# EAGLE board CapstoneControllerBoardtest (EAGLE 9.2.2)
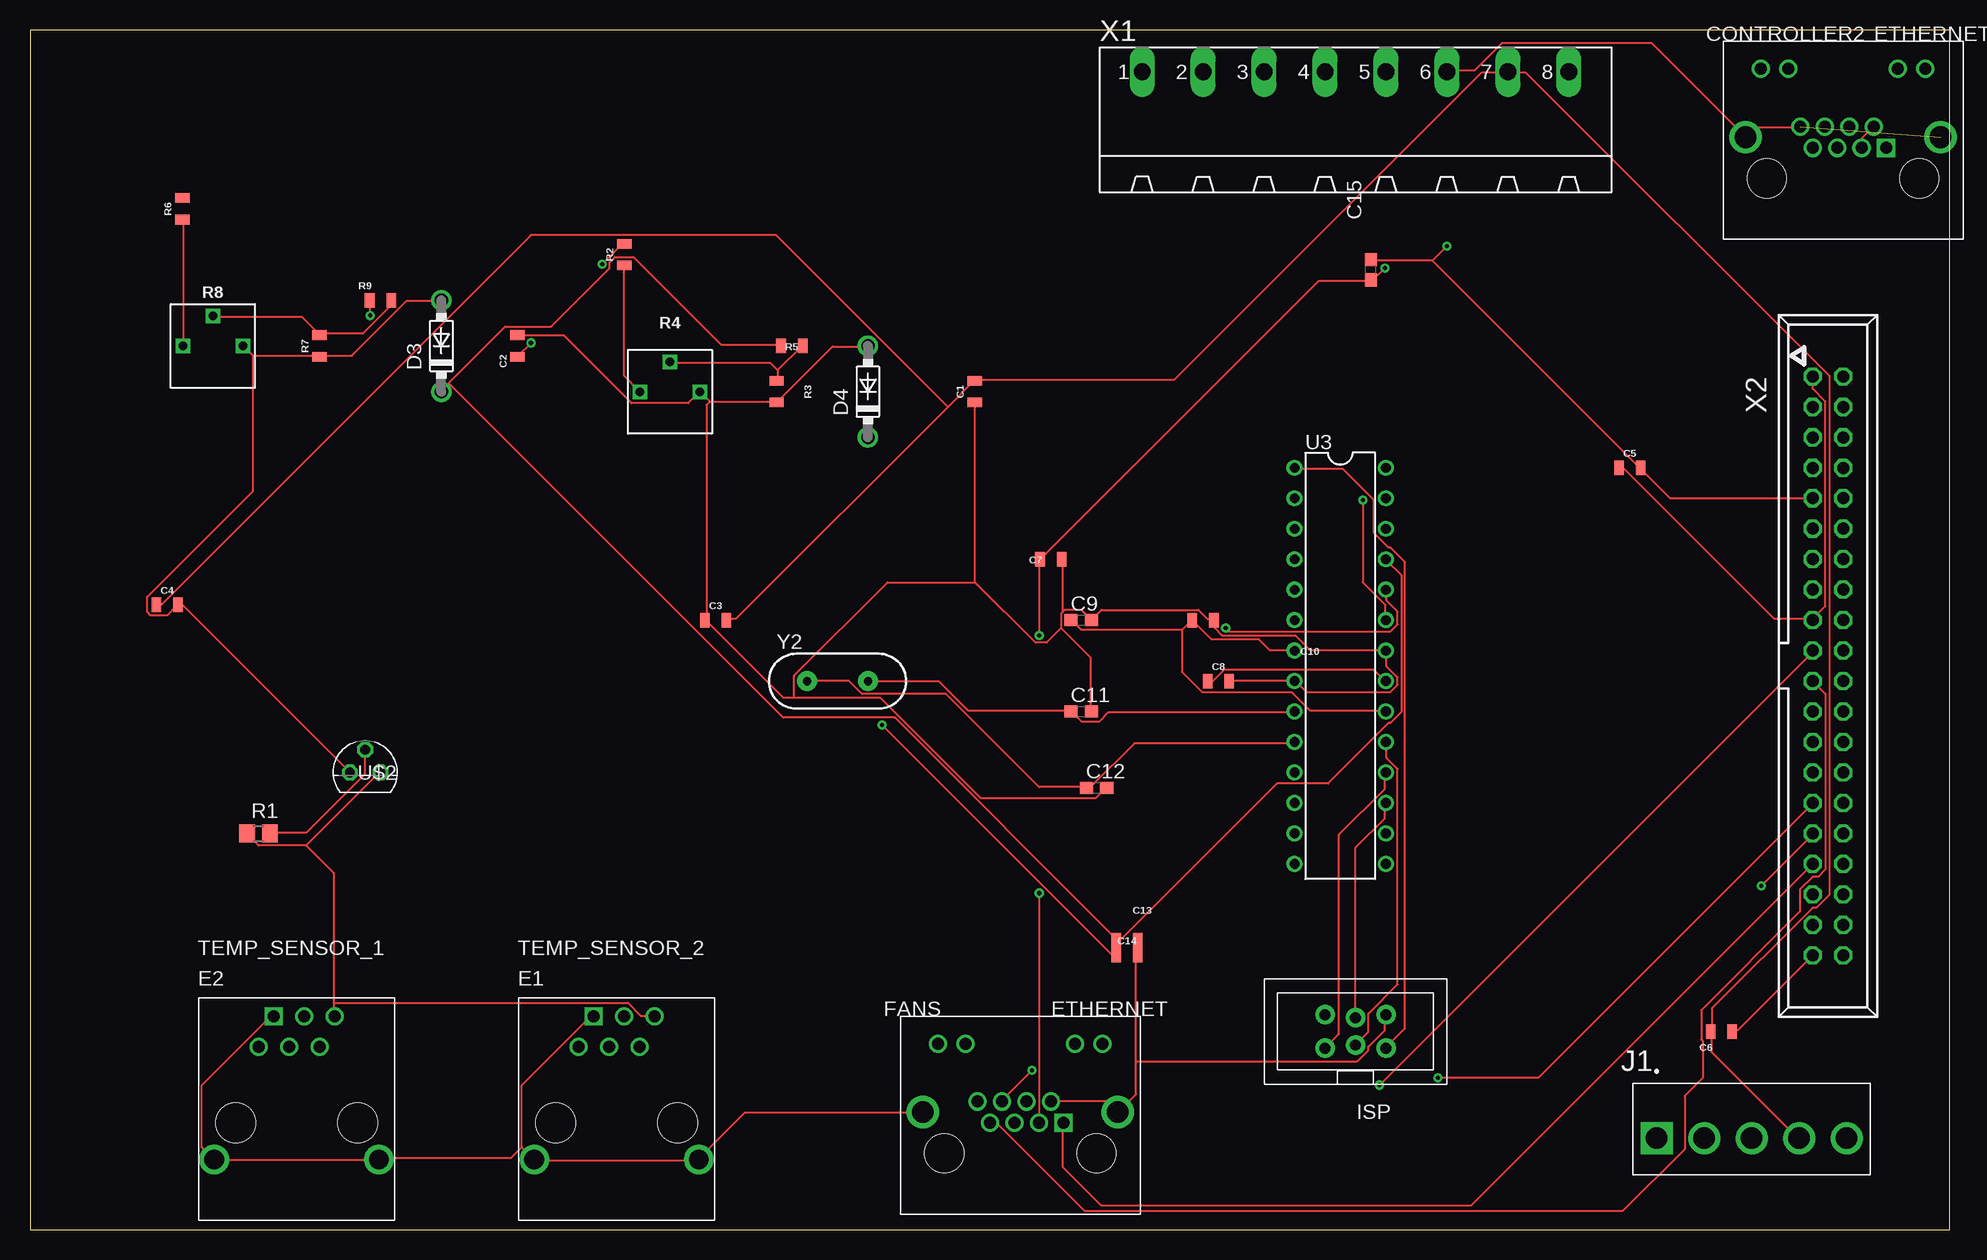
[diagram p0: board, top side]
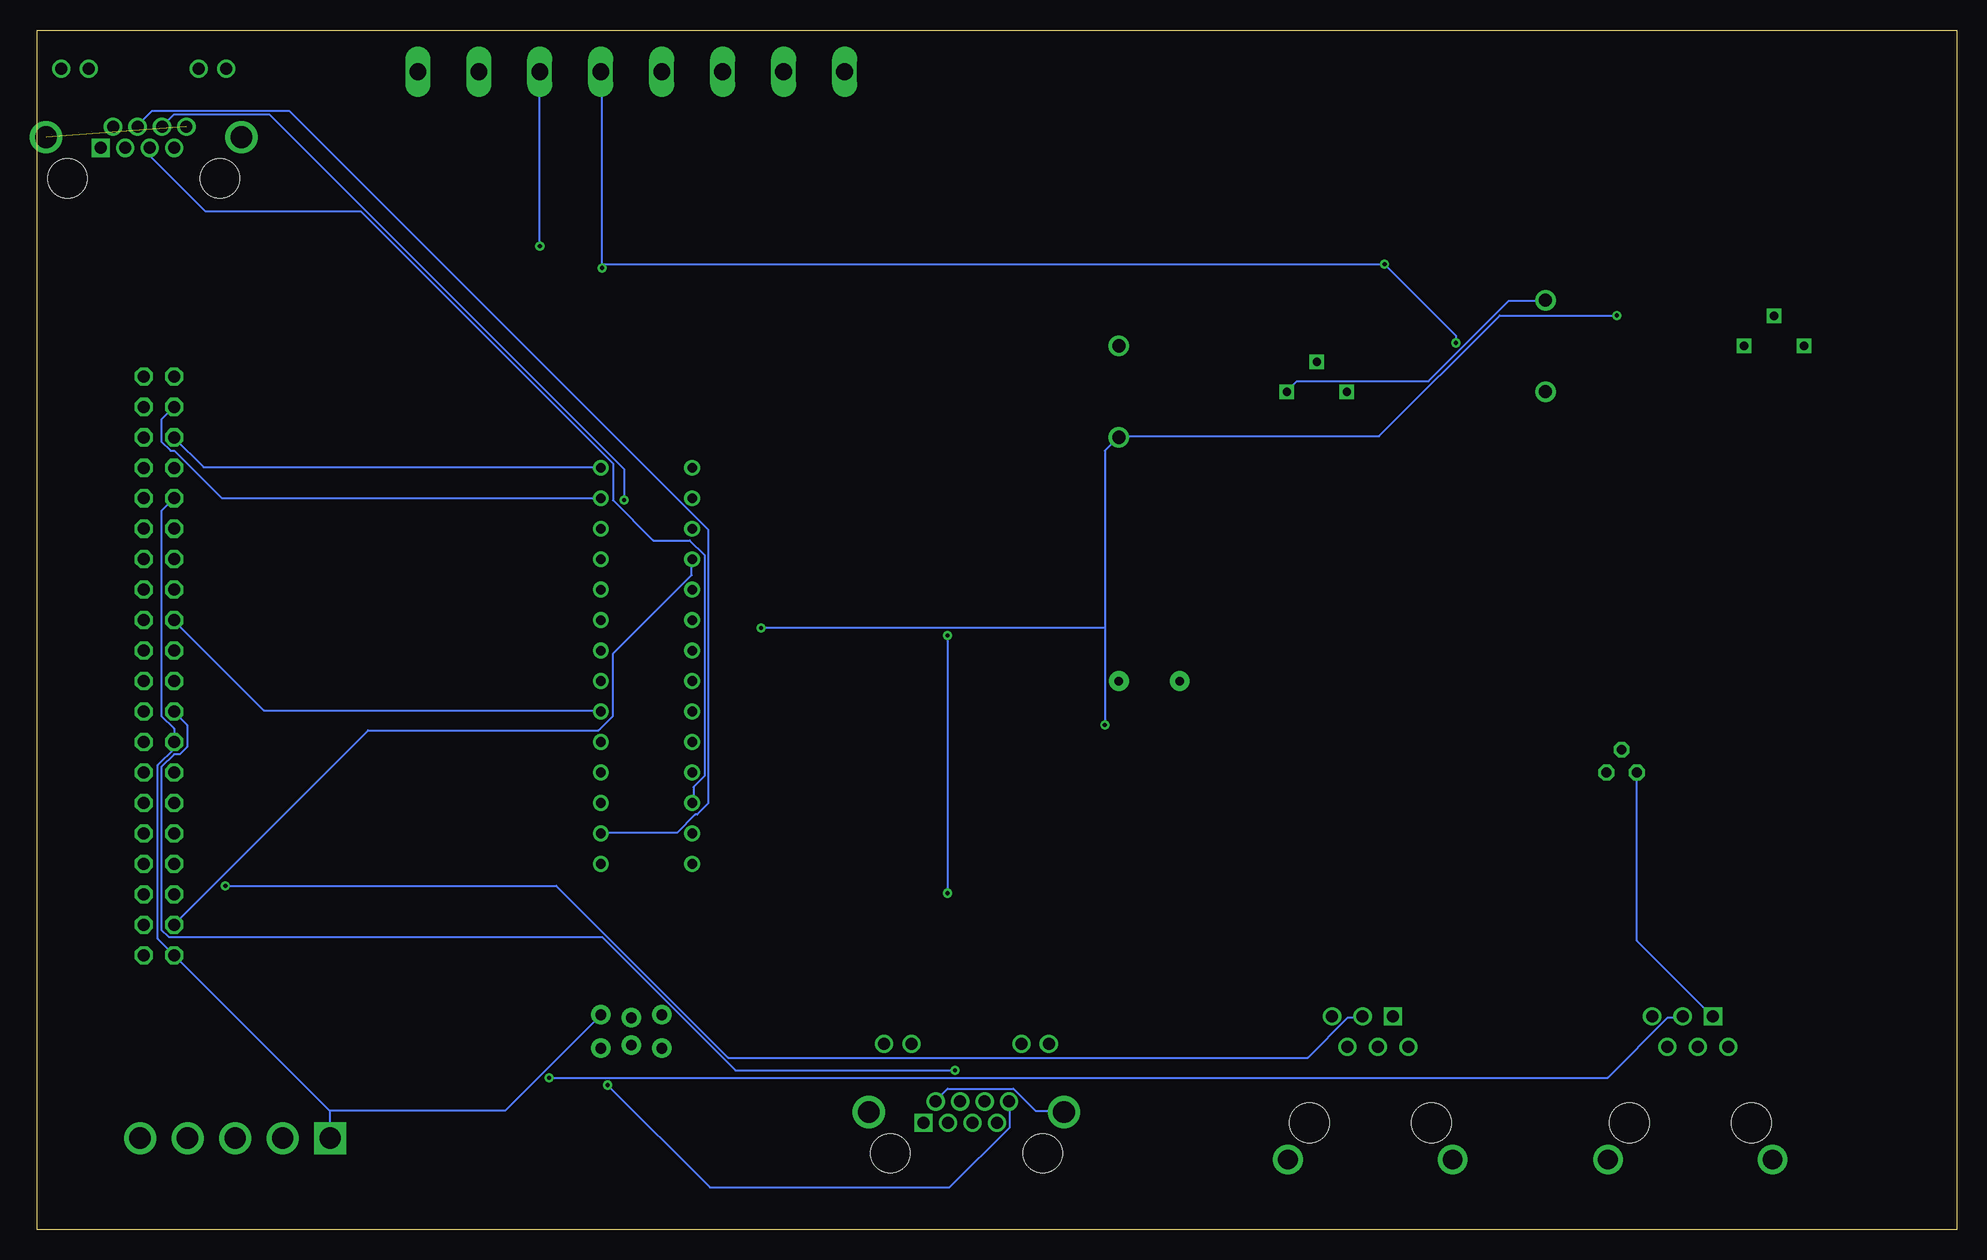
[diagram p1: board, bottom side, seen from below]

Size 160 x 100 mm. Coordinates in mm from the lower left corner, seen from the top.
Outline: 0,0 160,0 160,100 0,100 0,0
Copper layers (1*16): Top 0.035mm / dielectric 1.5mm / Bottom 0.035mm
Design rules "default": minimum track width 6mil, minimum drill 0.35mm, track to track 6mil, track to pad 6mil, pad to pad 6mil, via to via 6mil, smd to smd 6mil, copper to edge 40mil, drill to drill 6mil, minimum pad ring 10mil, minimum via ring 8mil, stop-mask expansion 4mil, vias tented up to drill 0mil, thermal gap 10mil

## Footprints (pad centres in the part's own frame; a part is rotated, then mirrored left to right if it is on the bottom)
0805 = smd 0.8 x 1.2: 1 -0.9,0; 2 0.9,0
C0603 = smd 1.1 x 1: 1 -0.85,0; 2 0.85,0
A122645-ND = drill 1 square: P$1 3.58,2.54 | drill 1: P$2 2.56,4.32; P$3 1.54,2.54; P$4 0.52,4.32; P$5 -0.5,2.54; P$6 -1.52,4.32; P$7 -2.54,2.54; P$8 -3.56,4.32; P$9 -6.86,9.14; P$10 -4.57,9.14; P$11 4.57,9.14; P$12 6.86,9.14 | drill 1.8: P$13 -8.13,3.43; P$14 8.13,3.43 | hole 3.25: -6.35,0; 6.35,0
DO41-7.6 = drill 1.1 pad 1.7: A 3.81,0; C -3.81,0
1734723-1_RJ11 = drill 1 square: 1 -2.54,2.54 | drill 1: 2 0,2.54; 3 2.54,2.54; 4 -3.81,0; 5 -1.27,0; 6 1.27,0 | drill 1.65: SH1 -7.5,-9.4; SH2 6.22,-9.4 | hole 3.3: -5.72,-6.35; 4.44,-6.35
AVRISP-BOX = drill 0.9 pad 1.626: 1 -1.397,2.54; 2 1.397,2.54; 3 -1.143,0; 4 1.143,0; 5 -1.397,-2.54; 6 1.397,-2.54
TE_3-641208-5 = drill 1.78 square: 1 -7.92,0 | drill 1.78: 2 -3.96,0; 3 0,0; 4 3.96,0; 5 7.92,0
R0805 = smd 1.3 x 1.5: 1 -0.95,0; 2 0.95,0
TRIM_POT = drill 0.7 square: 1 -2.5,0; 2 0,2.5; 3 2.5,0
PDIP-T28 = drill 0.813 pad 1.2: 1 -16.51,-3.81; 2 -13.97,-3.81; 3 -11.43,-3.81; 4 -8.89,-3.81; 5 -6.35,-3.81; 6 -3.81,-3.81; 7 -1.27,-3.81; 8 1.27,-3.81; 9 3.81,-3.81; 10 6.35,-3.81; 11 8.89,-3.81; 12 11.43,-3.81; 13 13.97,-3.81; 14 16.51,-3.81; 15 16.51,3.81; 16 13.97,3.81; 17 11.43,3.81; 18 8.89,3.81; 19 6.35,3.81; 20 3.81,3.81; 21 1.27,3.81; 22 -1.27,3.81; 23 -3.81,3.81; 24 -6.35,3.81; 25 -8.89,3.81; 26 -11.43,3.81; 27 -13.97,3.81; 28 -16.51,3.81
TO92 = drill 0.813 octagon: 1 -1.27,0; 2 0,1.905; 3 1.27,0
MSTBA8 = drill 1.397 long: 1 -17.78,5.08; 2 -12.7,5.08; 3 -7.62,5.08; 4 -2.54,5.08; 5 2.54,5.08; 6 7.62,5.08; 7 12.7,5.08; 8 17.78,5.08
057-040-1 = drill 1 octagon: 1 -24.13,-1.27; 2 -24.13,1.27; 3 -21.59,-1.27; 4 -21.59,1.27; 5 -19.05,-1.27; 6 -19.05,1.27; 7 -16.51,-1.27; 8 -16.51,1.27; 9 -13.97,-1.27; 10 -13.97,1.27; 11 -11.43,-1.27; 12 -11.43,1.27; 13 -8.89,-1.27; 14 -8.89,1.27; 15 -6.35,-1.27; 16 -6.35,1.27; 17 -3.81,-1.27; 18 -3.81,1.27; 19 -1.27,-1.27; 20 -1.27,1.27; 21 1.27,-1.27; 22 1.27,1.27; 23 3.81,-1.27; 24 3.81,1.27; 25 6.35,-1.27; 26 6.35,1.27; 27 8.89,-1.27; 28 8.89,1.27; 29 11.43,-1.27; 30 11.43,1.27; 31 13.97,-1.27; 32 13.97,1.27; 33 16.51,-1.27; 34 16.51,1.27; 35 19.05,-1.27; 36 19.05,1.27; 37 21.59,-1.27; 38 21.59,1.27; 39 24.13,-1.27; 40 24.13,1.27
HC49US = drill 0.7 pad 1.651: 1 -2.54,0; 2 2.54,0

## Placement (x,y rotation side)
C1  0.1uF  [0805]  78.74,69.85 90 top
C2  0.1uF  [0805]  40.64,73.66 90 top
C3  0.1uF  [0805]  57.15,50.8 0 top
C4  0.1uF  [0805]  11.43,52.07 0 top
C5  0.1uF  [0805]  133.35,63.5 0 top
C6  0.1uF  [0805]  140.97,16.51 0 top
C7  0.1uF  [0805]  85.09,55.88 0 top
C8  0.1uF  [0805]  99.06,45.72 0 top
C9  10uF  [C0603]  87.63,50.8 0 top
C10  0.1uF  [0805]  97.79,50.8 0 top
C11  22pF  [C0603]  87.63,43.18 0 top
C12  22pF  [C0603]  88.9,36.83 0 top
C13  0.1uF  [0805]  91.44,24.13 0 top
C14  0.1uF  [0805]  91.44,22.86 0 top
C15  10uF  [C0603]  111.76,80.01 90 top
CONTROLLER2  ETHERNET  [A122645-ND]  151.13,87.63 0 top
D3  3.3V Zener  [DO41-7.6]  34.29,73.66 90 top
D4  3.3V Zener  [DO41-7.6]  69.85,69.85 90 top
E1  TEMP_SENSOR_2  [1734723-1_RJ11]  49.53,15.24 0 top
E2  TEMP_SENSOR_1  [1734723-1_RJ11]  22.86,15.24 0 top
FANS  ETHERNET  [A122645-ND]  82.55,6.35 0 top
FRAME2  FRAME-LETTERNO_PACKAGE  [DUMMY]  -60.96,109.22 0 top  (outside the outline)
ISP  AVRISP-BOX  [AVRISP-BOX]  110.49,16.51 90 top
J1  3-641208-5  [TE_3-641208-5]  143.51,7.62 0 top
R1  [R0805]  19.05,33.02 0 top
R2  2.4k  [0805]  49.53,81.28 90 top
R3  1.2k  [0805]  62.23,69.85 90 top
R4  0-5k  [TRIM_POT]  53.34,69.85 0 top
R5  5k  [0805]  63.5,73.66 0 top
R6  16k  [0805]  12.7,85.09 90 top
R7  1.3k  [0805]  24.13,73.66 90 top
R8  0-5k  [TRIM_POT]  15.24,73.66 0 top
R9  5k  [0805]  29.21,77.47 0 top
U3  ATmega328P PDIP  [PDIP-T28]  109.22,46.99 270 top
U$2  DS18B  [TO92]  27.94,38.1 0 top
X1  MSTBA8  [MSTBA8]  110.49,91.44 0 top
X2  057-040-1  [057-040-1]  149.86,46.99 270 top
Y2  [HC49US]  67.31,45.72 0 top

## Library data of the parts
C1-C8 C10 C13 C14 = SparkFun-Capacitors; PROD_ID: CAP-11625
C9 C11 C12 C15 ISP = adafruit
CONTROLLER2 FANS = ETHERNET-3
D3 D4 R4 R8 U3 = CustomLibrary
E1 E2 = 5555140-6 RJ11
FRAME2 = SparkFun-Aesthetics; DESIGNER: Ben Vandenberg; REV: 0.0; VERSION: v01
J1 = 3-641208-5; AVAILABILITY: Unavailable; COMMENT: 3-641208-5; DESCRIPTION: MTA-156 Series, 3.96mm Pitch 5 Way 1 RowStraight PCB Header, Solder Term, 7A; EU_ROHS_COMPLIANCE: Compliant; MF: TE Connectivity; MP: 3-641208-5; PACKAGE: None; PRICE: None; TE_PURCHASE_URL: https://www.te.com/usa-en/product-3-641208-5.html?te_bu=Cor&te_type=disp&te_campaign=seda_glo_cor-seda-global-disp-prtnr-fy19-seda-model-bom-cta_sma-317_1&elqCampaignId=32493
R1 = rcl; SPICEPREFIX: R
R2 R3 R5-R7 R9 = SparkFun-Resistors; PROD_ID: RES-11622
U$2 = temperatureboardElizabeth
X1 = con-phoenix-508; MF: FARNELL; MPN: 1757307; OC_FARNELL: 3705225; OC_NEWARK: 71C4166
X2 = con-panduit; OC_FARNELL: unknown; OC_NEWARK: unknown
Y2 = SparkFun-FreqCtrl

## Nets
3.3V: C5.1 C9.1 C10.1 U3.7 U3.20 X2.1 X2.17
3.3V1: CONTROLLER2.P$1
3.3V_RETURN: CONTROLLER2.P$2 CONTROLLER2.P$3
12V: C2.1 C7.1 C15.1 FANS.P$3 R2.2 X1.5
46V: R6.2
46V1: CONTROLLER2.P$7
+5V: C1.2 C3.2 C4.1 C6.1 J1.4 X1.7
AIR_STARVE_RELAY: CONTROLLER2.P$5 U3.12
DPI: J1.5
DQ_1: E2.2 X2.29
DQ_2: E1.2 X2.31
DQ_3: R1.2 U$2.2
EXTRA_PIN_1: FANS.P$8 X2.19
EXTRA_PIN_2: FANS.P$7 X2.21
EXTRA_PIN_3: FANS.P$6 X2.23
EXTRA_PIN_4: FANS.P$5
FAN_PWM: FANS.P$1 X2.33
FUEL_CELL_CURRENT1: CONTROLLER2.P$6 U3.23
GATE_DRIVE: CONTROLLER2.P$4 U3.16
GND: C1.1 C2.2 C3.1 C4.2 C5.2 C6.2 C7.2 C8.2 C9.2 C10.2 C11.2 C12.2 C13.2 C14.2 C15.2 CONTROLLER2.P$8 CONTROLLER2.P$13 CONTROLLER2.P$14 D3.A D4.A E1.1 E1.SH1 E1.SH2 E2.1 E2.SH1 E2.SH2 FANS.P$2 FANS.P$13 FANS.P$14 ISP.6 J1.1 R3.1 R4.3 R7.1 R8.3 U3.8 U3.22 U$2.1 X1.6 X2.9 X2.25 X2.39
LOAD_ENABLE: U3.4 X2.37
N$1: C8.1 U3.21
N$2: ISP.1 U3.18
N$3: ISP.3 U3.19
N$7: R2.1 R4.1
N$10: R6.1 R8.1
N$11: R3.2 R4.2 R5.2
N$12: ISP.4 U3.17
N$13: C11.1 U3.9 Y2.2
N$14: C12.1 U3.10 Y2.1
N$15: R7.2 R8.2 R9.2
RESET: ISP.5 U3.1
SCALED_BATT_V: C13.1 D3.C R5.1 U3.25
SCALED_FUEL_CELL_V: C14.1 D4.C R9.1 U3.24
SCL: U3.28 X2.5
SDA: U3.27 X2.3
VCC: ISP.2
VDD: E1.3 E2.3 R1.1 U$2.3
WARNING_LED: FANS.P$4

## Tracks (layer width: path | path; a pad name or v marks a point on that pad's centre or on a via)
3.3V
  Top 0.152: 96.01,49.99 87.63,49.99 86.87,50.75 C9.1 | 96.01,49.99 96.77,50.75 C10.1 96.93,50.75 98.45,49.23 102.41,49.23 103.33,48.31 105.31,48.31 U3.7 | 96.01,49.99 96.01,46.48 97.69,44.81 105.16,44.81 106.68,43.28 112.93,43.28 U3.20 | 148.59,50.9 145.39,50.9 132.89,63.4 132.59,63.4 C5.1 | X2.1 148.59,70.1 149.66,69.04 149.66,51.97 148.59,50.9 | 148.59,50.9 X2.17
  Bottom 0.152: U3.20 113.08,43.28 141.12,43.28 148.59,50.75 X2.17
3.3V_RETURN
  Top 0.152: CONTROLLER2.P$3 152.71,90.22 152.71,90.98 153.62,91.9 CONTROLLER2.P$2
12V  (via drill 0.35)
  Top 0.152: v41.76,73.91 40.69,72.85 C2.1 | v47.7,80.47 49.53,82.3 R2.2 | v84.12,28.04 84.12,8.99 FANS.P$3 | v84.12,49.53 84.12,55.78 C7.1 84.28,55.93 107.44,79.1 111.71,79.1 C15.1 111.86,79.1 v112.93,80.16
  Bottom 0.152: v41.76,73.91 41.76,74.52 v47.7,80.47 112.93,80.47 | v84.12,49.53 v84.12,28.04 | 112.93,80.47 112.93,96.47 X1.5 | 112.93,80.47 v112.93,80.16
+5V
  Top 0.152: J1.4 147.37,7.62 140.21,14.78 140.21,16.46 C6.1 140.21,16.61 140.21,18.44 148.59,26.82 148.9,26.82 149.96,27.89 149.96,71.17 124.66,96.47 123.29,96.47 X1.7 123.14,96.47 121.01,96.47 95.4,70.87 78.79,70.87 C1.2 78.64,70.71 76.5,68.58 | 76.5,68.58 58.83,50.9 58.06,50.9 C3.2 | 76.5,68.58 62.18,82.91 41.76,82.91 10.97,52.12 10.67,52.12 C4.1
AIR_STARVE_RELAY
  Bottom 0.152: U3.12 105.31,35.66 105.31,36.88 104.39,37.8 104.39,56.24 105.61,57.45 108.66,57.45 112.01,60.81 112.01,63.86 133.04,84.89 146,84.89 150.57,89.46 150.57,90.07 CONTROLLER2.P$5
DQ_1  (via drill 0.35)
  Top 0.152: v117.35,12.65 125.73,12.65 148.59,35.51 X2.29
  Bottom 0.152: v117.35,12.65 29.11,12.65 24.08,17.68 22.86,17.68 E2.2
DQ_2  (via drill 0.35)
  Top 0.152: v144.32,28.65 148.59,32.92 X2.31
  Bottom 0.152: v144.32,28.65 116.74,28.65 102.41,14.33 54.1,14.33 50.75,17.68 49.53,17.68 E1.2
DQ_3
  Top 0.152: R1.2 20.12,33.07 23.01,33.07 27.89,37.95 27.89,39.93 U$2.2
EXTRA_PIN_1  (via drill 0.35)
  Top 0.152: v112.47,12.04 148.59,48.16 X2.19
  Bottom 0.152: v112.47,12.04 103.94,3.5 83.97,3.5 78.94,8.53 78.94,10.67 FANS.P$8
EXTRA_PIN_2
  Top 0.152: X2.21 149.66,44.65 149.66,30.02 149.05,29.41 148.59,29.41 147.52,28.35 147.52,26.52 139.29,18.29 139.29,15.85 139.45,15.7 139.45,12.65 137.92,11.12 137.92,6.71 132.74,1.52 87.94,1.52 80.62,8.84 80.01,8.84 FANS.P$7
EXTRA_PIN_3  (via drill 0.35)
  Top 0.152: v83.52,13.26 81.08,10.82 FANS.P$6
  Bottom 0.152: v83.52,13.26 101.8,13.26 112.93,24.38 149.05,24.38 149.66,24.99 149.66,38.56 148.59,39.62 148.13,39.62 147.52,40.23 147.52,42.06 148.59,43.13 X2.23
FAN_PWM
  Top 0.152: X2.33 120.09,1.98 89.31,1.98 86.11,5.18 86.11,8.84 FANS.P$1
FUEL_CELL_CURRENT1  (via drill 0.35)
  Top 0.152: v111.1,60.81 111.1,53.95 112.93,52.12 112.93,50.9 U3.23
  Bottom 0.152: v111.1,60.81 111.1,63.4 140.66,92.96 148.59,92.96 149.5,92.05 CONTROLLER2.P$6
GATE_DRIVE
  Bottom 0.152: U3.16 112.93,33.07 106.68,33.07 105.16,34.59 105,34.59 104.09,35.51 104.09,58.37 138.99,93.27 150.42,93.27 151.64,92.05 CONTROLLER2.P$4
GND  (via drill 0.35)  (1 unrouted)
  Top 0.152: C8.2 U3.8 105.46,45.72 106.38,44.81 113.39,44.81 114,45.41 114,46.02 113.08,46.94 113.08,48.16 U3.22 112.93,48.31 106.68,48.31 105.46,49.53 99.36,49.53 98.75,50.14 98.75,50.75 C10.2 98.6,50.9 98.15,50.9 97.38,51.66 89.31,51.66 88.54,50.9 C9.2 88.39,50.9 87.63,51.66 86.26,51.66 86.11,51.51 | 85.95,50.14 88.39,47.7 88.39,43.28 C11.2 | 85.95,50.14 85.95,51.36 86.11,51.51 | 86.11,51.51 86.11,55.78 C7.2 | 78.79,53.95 78.79,68.89 C1.1 | 78.79,53.95 83.82,48.92 84.73,48.92 85.95,50.14 | 63.7,44.35 62.79,44.35 56.39,50.75 C3.1 56.39,50.9 56.39,68.73 56.69,69.04 | 63.7,44.35 70.87,44.35 79.25,35.97 88.85,35.97 89.61,36.73 C12.2 | 18.59,72.85 24.08,72.85 R7.1 24.23,72.85 26.82,72.85 31.39,77.42 34.29,77.42 D3.A | 18.59,72.85 17.83,73.61 R8.3 | C2.2 40.69,74.52 44.5,74.52 50.14,68.89 54.86,68.89 55.78,69.8 R4.3 55.93,69.8 56.69,69.04 | 56.69,69.04 62.18,69.04 R3.1 62.33,69.04 66.9,73.61 69.8,73.61 D4.A | 78.79,53.95 71.48,53.95 63.7,46.18 63.7,44.35 | X2.39 142.34,16.61 141.88,16.61 C6.2 | CONTROLLER2.P$8 147.52,91.9 143.87,91.9 143.1,91.14 CONTROLLER2.P$13 142.95,91.14 135.18,98.91 122.68,98.91 120.4,96.62 118.11,96.62 X1.6 | 116.89,80.77 111.86,80.77 C15.2 | 116.89,80.77 134.11,63.55 C5.2 134.26,63.4 136.7,60.96 X2.9 | 116.89,80.77 v118.11,81.99 | C13.2 92.35,24.08 92.35,22.86 C14.2 92.2,22.86 92.2,14.02 | 92.2,14.02 92.2,11.28 90.83,9.91 FANS.P$14 90.68,9.91 89.92,10.67 85.19,10.67 FANS.P$2 | 92.2,14.02 110.64,14.02 111.56,14.94 111.56,15.24 112.93,16.61 112.93,17.83 ISP.6 | U$2.1 12.8,51.97 12.34,51.97 C4.2 12.19,51.97 11.43,51.21 10.06,51.21 9.75,51.51 9.75,52.73 18.59,61.57 18.59,72.85
  Top 0.152: E2.1 20.27,17.68 19.96,17.68 14.33,12.04 14.33,6.86 15.24,5.94 E2.SH1 15.39,5.79 28.96,5.79 E2.SH2 29.11,5.94 40.08,5.94 41,6.86 | 41,6.86 41,12.04 46.63,17.68 46.94,17.68 E1.1 | 41,6.86 41.91,5.94 E1.SH1 42.06,5.79 55.63,5.79 E1.SH2 55.78,5.94 59.59,9.75 74.37,9.75 FANS.P$13
  Bottom 0.152: D3.A 34.29,77.42 37.34,77.42 44.04,70.71 55.02,70.71 55.78,69.95 R4.3 | 135.64,9.91 135.64,7.62 J1.1 | 135.64,9.91 X2.39 149.96,24.23 149.96,38.71 148.59,40.08 X2.25 148.59,41.76 149.66,42.82 149.66,59.89 X2.9 | v118.11,81.99 X1.6 | FANS.P$13 74.52,9.91 76.81,9.91 78.64,11.73 84.12,11.73 85.04,10.82 FANS.P$2 | U$2.1 26.67,24.08 20.42,17.83 E2.1 | 135.64,9.91 121.01,9.91 113.08,17.83 ISP.6
LOAD_ENABLE
  Bottom 0.152: U3.4 105.46,55.78 105.46,54.56 112.01,48.01 112.01,42.82 113.23,41.6 132.44,41.6 148.59,25.45 X2.37
N$1
  Top 0.152: C8.1 98.6,45.72 99.52,46.63 112.01,46.63 112.93,45.72 U3.21
N$2
  Top 0.152: U3.18 112.93,38.1 112.93,36.73 109.12,32.92 109.12,16.31 108.05,15.24 ISP.1
N$3
  Top 0.152: U3.19 113.08,40.54 113.08,39.32 114,38.41 114,20.42 111.56,17.98 111.56,16.46 110.49,15.39 ISP.3
N$7
  Top 0.152: R2.1 49.53,71.17 50.75,69.95 R4.1
N$10
  Top 0.152: R6.1 12.8,84.12 12.8,73.76 R8.1
N$11
  Top 0.152: 62.33,71.63 62.33,70.87 R3.2 | 62.33,71.63 64.31,73.61 R5.2 | 62.33,71.63 61.72,72.24 53.34,72.24 R4.2
N$12
  Top 0.152: ISP.4 110.49,31.85 112.93,34.29 112.93,35.51 U3.17
N$13
  Top 0.152: Y2.2 75.74,45.72 78.18,43.28 86.72,43.28 C11.1 86.87,43.13 87.63,42.37 89.15,42.37 89.92,43.13 105.31,43.13 U3.9
N$14
  Top 0.152: U3.10 105.31,40.54 92.05,40.54 88.39,36.88 88.09,36.88 C12.1 87.94,36.88 84.12,36.88 76.35,44.65 69.34,44.65 68.28,45.72 Y2.1
N$15
  Top 0.152: R9.2 30.02,77.42 30.02,76.96 27.74,74.68 24.23,74.68 R7.2 24.08,74.68 22.71,76.05 15.24,76.05 R8.2
RESET
  Top 0.152: U3.1 105.46,63.4 109.42,63.4 112.01,60.81 112.01,58.06 113.23,56.84 113.39,56.84 114.61,55.63 114.61,16.76 113.08,15.24 ISP.5
SCALED_BATT_V
  Top 0.152: 34.9,70.56 34.29,69.95 D3.C | 34.9,70.56 39.62,75.29 43.43,75.29 48.31,80.16 48.31,80.62 48.77,81.08 50.29,81.08 57.61,73.76 62.48,73.76 R5.1 | U3.25 113.08,55.78 114.3,54.56 114.3,43.13 113.39,42.22 113.23,42.22 108.2,37.19 103.94,37.19 90.98,24.23 90.68,24.23 C13.1 90.53,24.23 72.08,42.67 62.79,42.67 34.9,70.56
SCALED_FUEL_CELL_V  (via drill 0.35)
  Top 0.152: v28.35,76.2 28.35,77.42 R9.1 | C14.1 90.22,22.86 v71.02,42.06 | v99.67,50.14 99.97,49.84 113.39,49.84 114,50.44 114,51.51 113.08,52.43 113.08,53.34 U3.24
  Bottom 0.152: v28.35,76.2 38.1,76.2 48.16,66.14 69.8,66.14 D4.C 69.95,65.99 71.02,64.92 71.02,50.14 | 71.02,50.14 v71.02,42.06 | 71.02,50.14 v99.67,50.14
SCL
  Bottom 0.152: U3.28 113.08,63.55 146.15,63.55 148.59,65.99 X2.5
SDA
  Bottom 0.152: U3.27 144.63,60.96 148.59,64.92 148.9,64.92 149.66,65.68 149.66,67.51 X2.3
VDD
  Top 0.152: 23.01,32 19.05,32 18.14,32.92 R1.1 | 23.01,32 29.11,38.1 U$2.3 | 25.3,18.9 25.3,29.72 23.01,32 | 25.3,18.9 25.3,17.83 E2.3 | 25.3,18.9 49.84,18.9 50.9,17.83 51.97,17.83 E1.3